# Altium PCB CW308T_AVR.PcbDoc
Units mil, origin at the board's own origin, x right, y up, seen from the top; angles counter-clockwise.
Board outline 2060 x 2680 mil, 2 copper layers (Top Layer, Bottom Layer); 14 components, 24 nets, 112 pads, 119 vias.
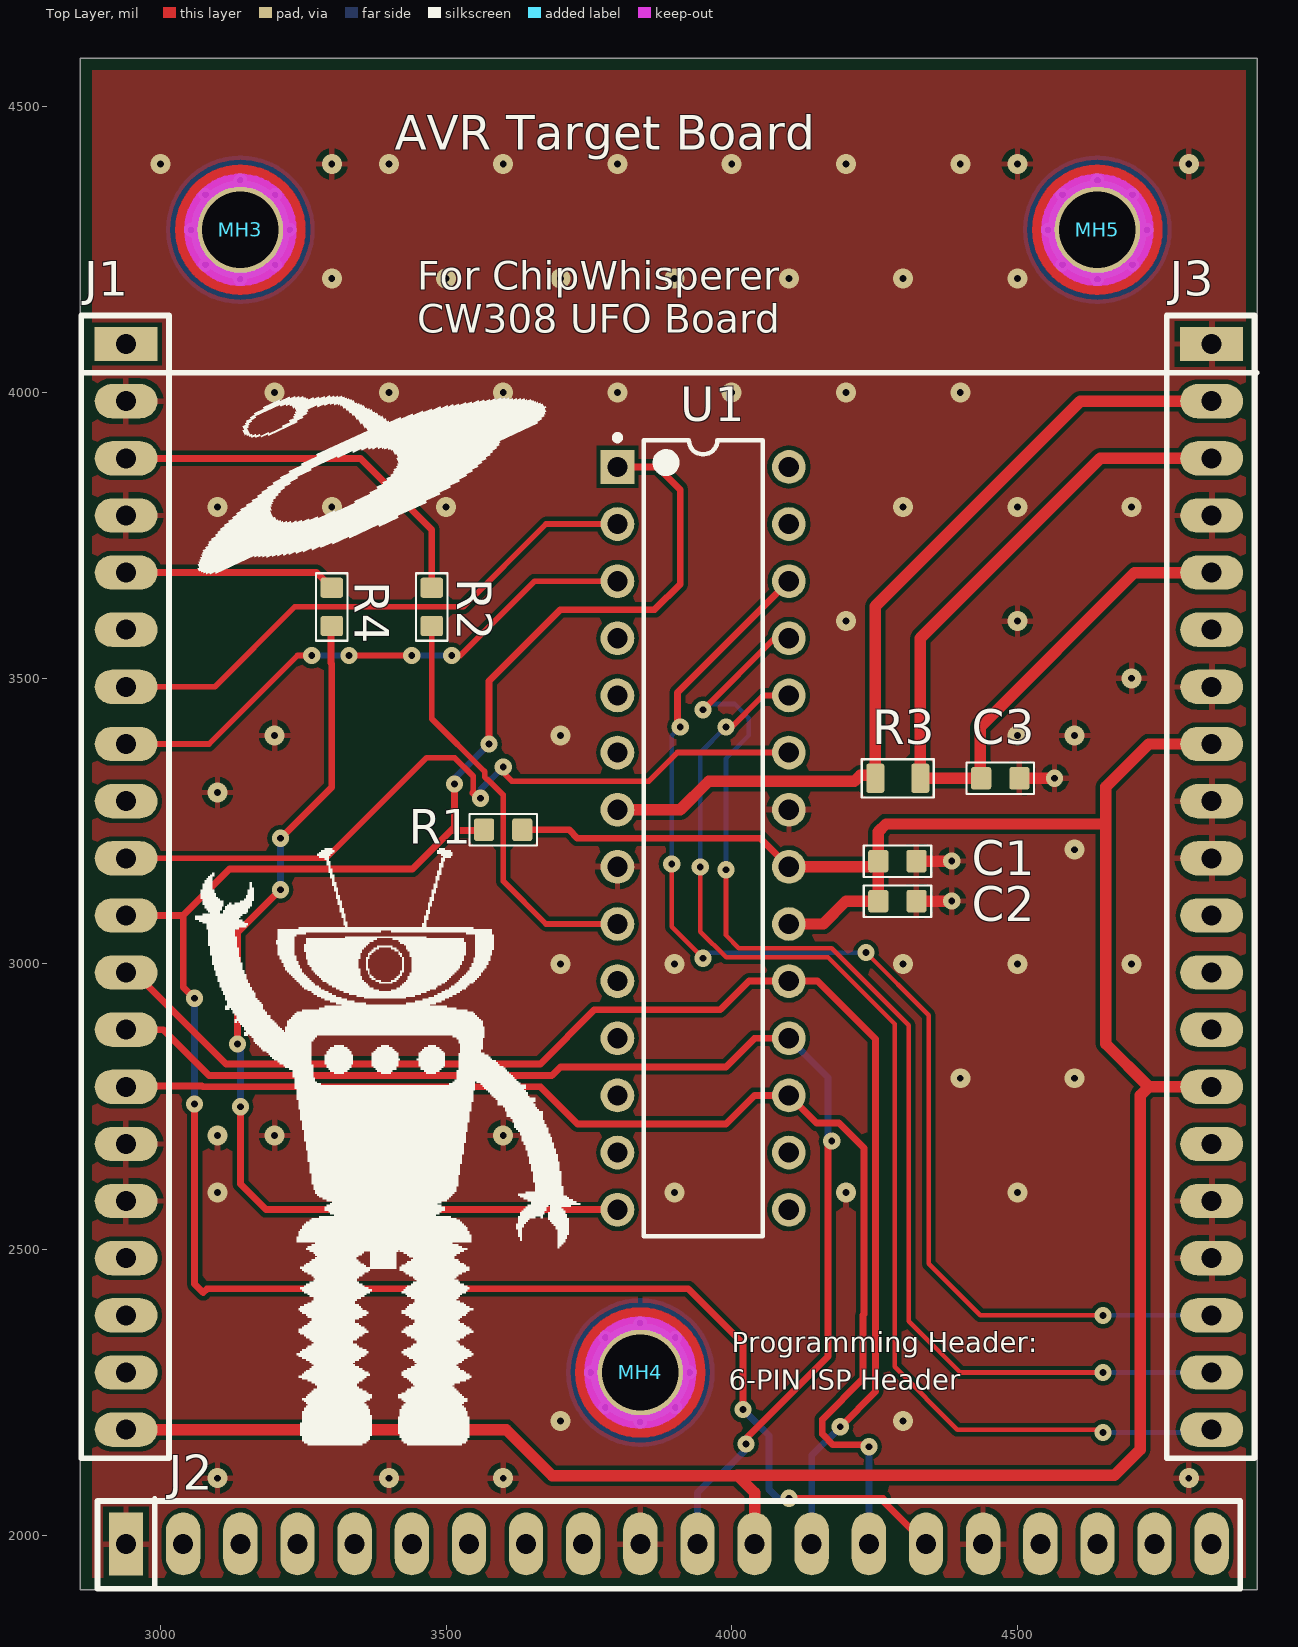
[diagram p0: Top Layer view]
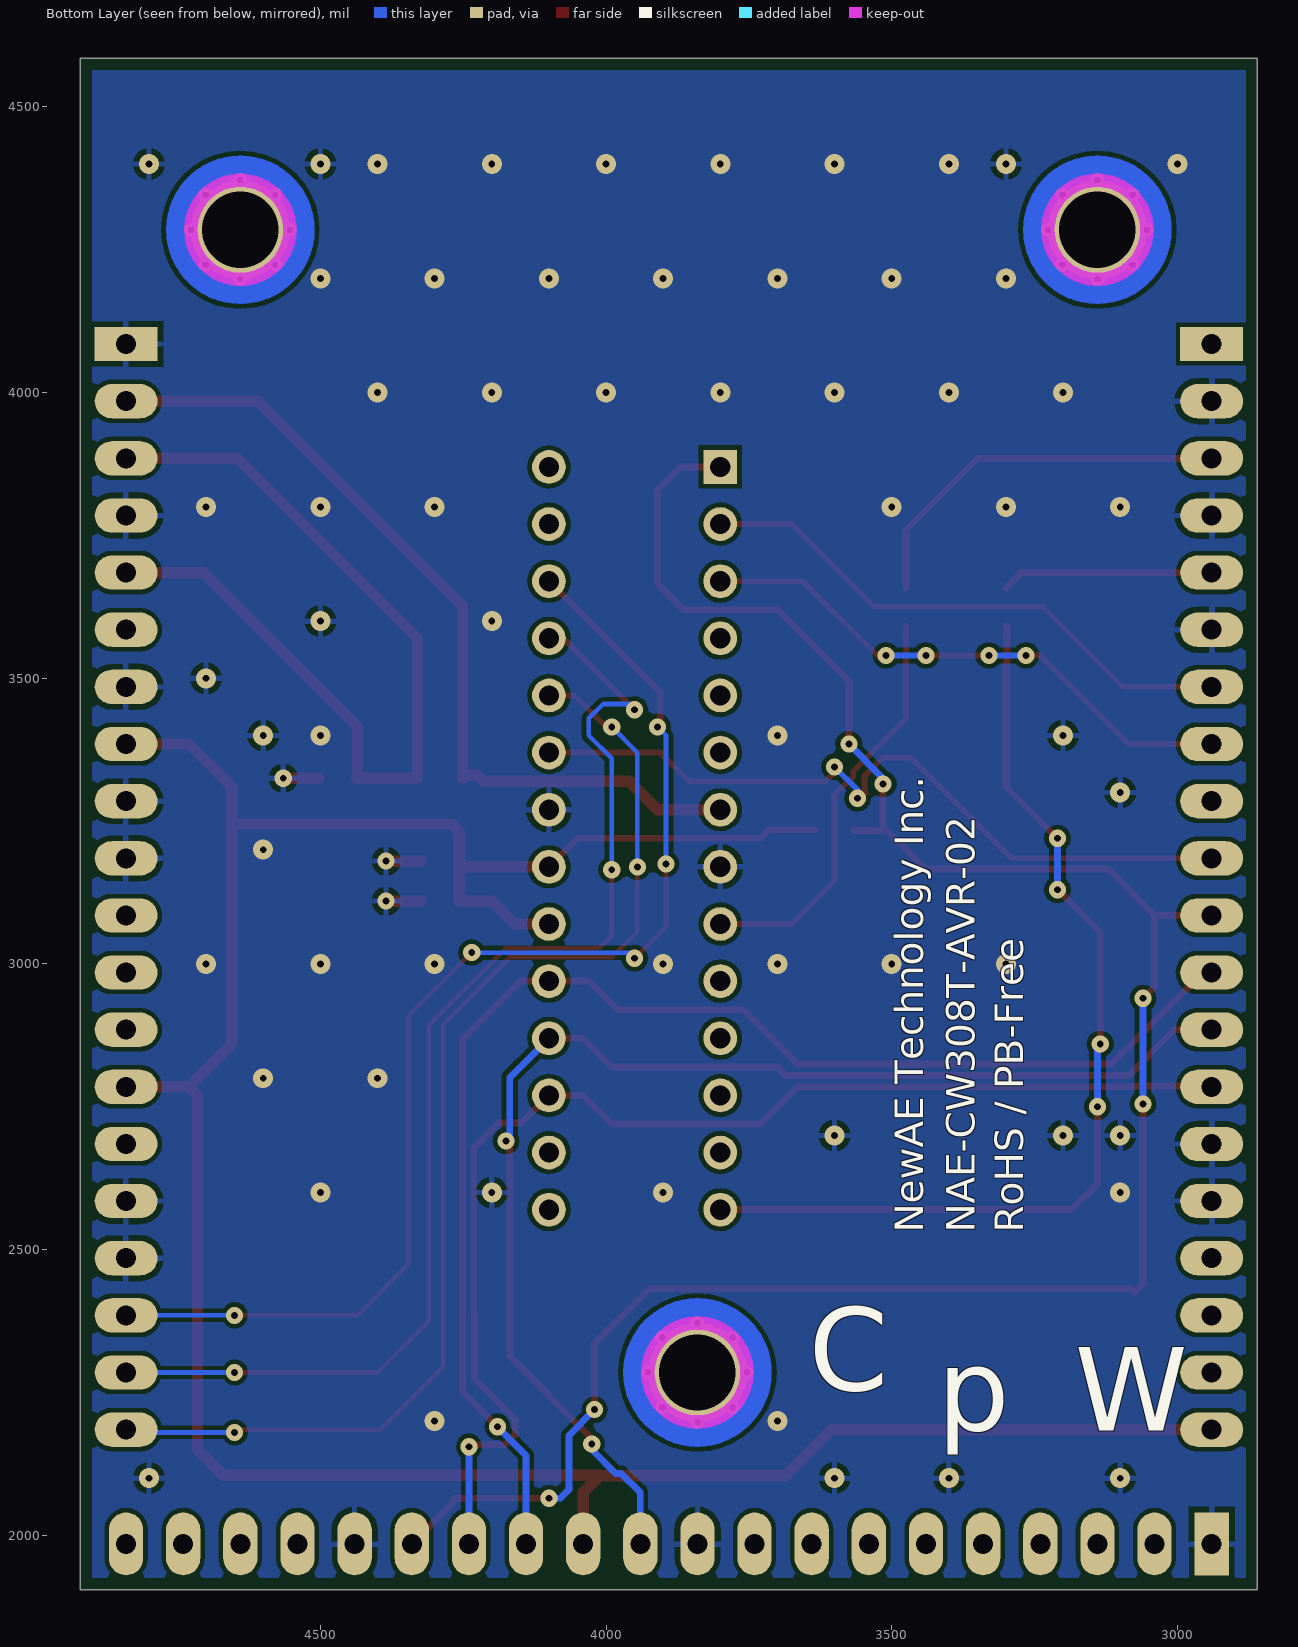
[diagram p1: Bottom Layer view, seen from below]
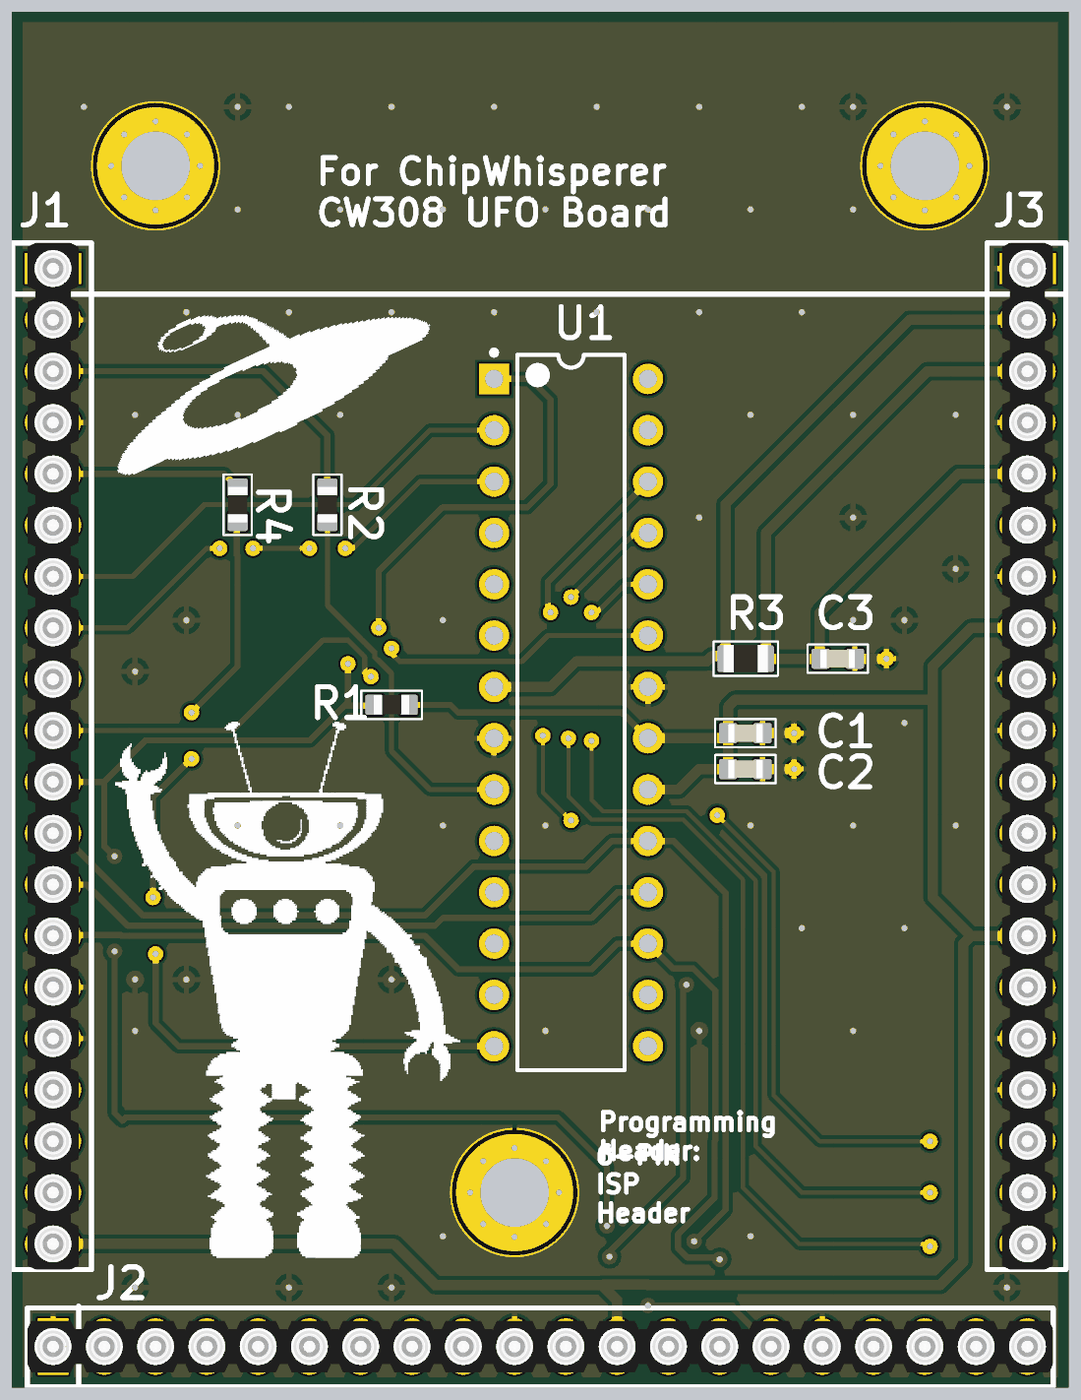
[diagram p2: 3D render of the assembled board from above, using the file's embedded part models]

## Layer stack, top to bottom
Top Solder: solder mask 0.4, Solder Resist, Dk 3.5
Top Layer: signal copper 1.4
Dielectric 1: dielectric 12.6, FR-4, Dk 4.8
Bottom Layer: signal copper 1.4
Bottom Solder: solder mask 0.4, Solder Resist, Dk 3.5

## Board outline
2860,1905 4920,1905 4920,4585 2860,4585

## Design rules (kind name [scope] priority, off if disabled: settings)
BoardOutlineClearance [All] p1: gap=20 except(0: Arc-SplitContinuation Track-SplitContinuation SMDPad-SplitContinuation THPad-SplitContinuation Via-SplitContinuation Fill-SplitContinuation Poly-SplitContinuation Region-SplitContinuation Text-SplitContinuation)
Clearance [All] p1: gap=8
PolygonConnect [All] p1: connectstyle=Relief reliefconductorwidth=10 reliefentries=4 polygonreliefangle="90 Angle" airgapwidth=10
RoutingVias [All] p1: holewidth=20 width=35 viastyle="Through Hole" minholewidth=12 minwidth=30 maxholewidth=28 maxwidth=50
SolderMaskExpansion [All] p1: expansion=4
Width [All] p1: maxlimit=50 minlimit=8 preferedwidth=10 minimp=50.000000 maximp=50.000000 favimp=50.000000
30 further rules are at their usual default settings.

## Classes and differential pairs
component class CW308T_AVR_MICRO: C1 C2 R1 U1
component class CW308T_AVR_CONN: C3 J1 J2 J3 MH3 MH4 MH5 R2 R3 R4

## Components (designator, comment, footprint, x,y, rotation, side; value= is the part's Value field where it differs from the comment)
C1 "approved sub OK" CAPC1608X90N 4290,3180 r0 top
C2 "approved sub OK" CAPC1608X90N 4290,3110 r0 top
C3 "approved sub OK" CAPC1608X90N 4470,3325 r0 top
J1 "20-Pin Header" 801-87-020-10-001101 2940,4085 r0 top locked
J2 "20-Pin Header" 801-87-020-10-001101 2940,1985 r90 top locked
J3 "20-Pin Header" 801-87-020-10-001101 4840,4085 r0 top locked
MH3 "Mounting-Hole-RND-Altium" Mounting-Hole-RND-Altium 3140,4285 r0 top locked
MH4 "Mounting-Hole-RND-Altium" Mounting-Hole-RND-Altium 3840,2285 r0 top locked
MH5 "Mounting-Hole-RND-Altium" Mounting-Hole-RND-Altium 4640,4285 r0 top locked
R1 "Thick Film" RESC1608X55N 3600,3235 r180 top
R2 "Thick Film" RESC1608X55N 3475,3625 r90 top
R3 "Thick Film" RESC2012X70N 4290.63,3325 r0 top
R4 "Thick Film" RESC1608X55N 3300,3625 r90 top
U1 "ATmega328P-PU" 28P3 3950,3220 r0 top

## Footprints (in the part's own frame and the unit in brackets; to place one, negate y for a bottom-side part, rotate by r counter-clockwise, add the part's x,y. Pads: shape width x height; smd on the part's side, far side on the other; paste and mask are expansions set on the pad)
28P3 [mm] "28-Pin Plastic Dual In-Line Package (PDIP)"
  rect 1.5x1.5 hole 0.9: 1(-3.81,16.51)
  round 1.5 hole 0.9: 2(-3.81,13.97) 3(-3.81,11.43) 4(-3.81,8.89) 5(-3.81,6.35) 6(-3.81,3.81) 7(-3.81,1.27) 8(-3.81,-1.27) 9(-3.81,-3.81) 10(-3.81,-6.35) 11(-3.81,-8.89) 12(-3.81,-11.43) 13(-3.81,-13.97) 14(-3.81,-16.51) 15(3.81,-16.51) 16(3.81,-13.97) 17(3.81,-11.43) 18(3.81,-8.89) 19(3.81,-6.35) 20(3.81,-3.81) 21(3.81,-1.27) 22(3.81,1.27) 23(3.81,3.81) 24(3.81,6.35) 25(3.81,8.89) 26(3.81,11.43) 27(3.81,13.97) 28(3.81,16.51)
  silkscreen extent -3.93,-17.7 2.65,17.93, body extent -3.6,-17.65 3.6,17.65, height 4.58
801-87-020-10-001101 [mil]
  rect 110x60 hole 35: 1(0,0)
  oval 110x60 hole 35: 2(0,-100) 3(0,-200) 4(0,-300) 5(0,-400) 6(0,-500) 7(0,-600) 8(0,-700) 9(0,-800) 10(0,-900) 11(0,-1000) 12(0,-1100) 13(0,-1200) 14(0,-1300) 15(0,-1400) 16(0,-1500) 17(0,-1600) 18(0,-1700) 19(0,-1800) 20(0,-1900)
  silkscreen extent -79,-1950 79,50, body extent -50,-1950 50,50, height 224
CAPC1608X90N [mm] "Chip Capacitor, Body 1.6x0.8mm, EIA 0603, IPC Medium Density"
  round 0.254 on Mech15: 0(0,0)
  rrect25% 0.9x1 smd: 1(-0.85,0) 2(0.85,0)
  Top Layer pour cut-out: -0.6,0.5 -0.4,0.7 0.4,0.7 0.6,0.5 0.6,-0.5 0.4,-0.7 -0.4,-0.7 -0.6,-0.5
  silkscreen extent -1.5,-0.7 1.5,0.7, body extent -0.85,-0.45 0.85,0.45, height 0.89
Mounting-Hole-RND-Altium [mm] "Mounting Hole, Altium, 4.4mm pad, 3.4mm plated hole"
  round 4.4 hole 3.4 mask+0.038: MOUNT(0,0)
  Top Layer circle w1: c0,0 r2.4
  Bottom Layer circle w1.2: c0,0 r2.702
  Keep-Out Layer circle w0.6: c0,0 r2.2
RESC1608X55N [mm] "Chip Resistor, Body 1.6x0.8mm, EIA 0603, IPC Medium Density"
  round 0.254 on Mech15: 0(0,0)
  rrect25% 0.9x1 smd: 1(-0.85,0) 2(0.85,0)
  Top Layer pour cut-out: -0.6,0.5 -0.4,0.7 0.4,0.7 0.6,0.5 0.6,-0.5 0.4,-0.7 -0.4,-0.7 -0.6,-0.5
  silkscreen extent -1.5,-0.7 1.5,0.7, body extent -0.87,-0.47 0.88,0.48, height 0.54
RESC2012X70N [mm] "Chip Resistor, Body 2.0x1.2mm, EIA 0805, IPC Medium Density"
  round 0.254 on Mech15: 0(0,0)
  rrect25% 0.8x1.3 smd: 1(-1,0) 2(1,0)
  Top Layer pour cut-out: -0.725,0.65 -0.525,0.85 0.525,0.85 0.725,0.65 0.725,-0.65 0.525,-0.85 -0.525,-0.85 -0.725,-0.65
  silkscreen extent -1.6,-0.85 1.6,0.85, body extent -1.1,-0.67 1.1,0.68, height 0.69

## Part data
C1 C2 C3: library part CAPC_100n_0603_X7R_50V_10%, "Capacitor SMD Cer 100nF 10% 50V X7R 0603"
J1 J2 J3: library part 801-87-020-10-001101, "1x20 Header, Machined"
MH3 MH4 MH5: library part CMP-0001-00029-1, "Mounting Hole, Altium, 4.4mm pad, 3.4mm plated hole"
R1: library part RES_10K_0603_1%, "Resistor SMD chip 10k Ohm 0.1W 1% 0603"
R2 R4: library part RES_100R_0603_1%, "Resistor SMD chip 100 Ohm 0.1W 1% 0603"
R3: library part RES_15R_0805_5%, "Resistor SMD chip 15 Ohm 0.125W 5% 0805"
U1: library part CMP-0095-00013-2, "8-bit AVR Microcontroller, 32KB Flash, 1KB EEPROM, 2KB SRAM, 28-pin PDIP, Industrial Grade (-40°C to 85°C)"

## Via types
v1: diameter 35, hole 12, Top Layer to Bottom Layer, tented both sides, 61 vias
v2: diameter 30, hole 12, Top Layer to Bottom Layer, 26 vias
v3: diameter 23.62, hole 11.81, Top Layer to Bottom Layer, tented both sides, 24 vias
v4: diameter 30, hole 12, Top Layer to Bottom Layer, tented both sides, 8 vias

## Nets (pads, with @x,y where several pads share a name; then routed paths per layer and width w, separated by ;. In a path a pad name is that pad's centre, name@x,y a point inside that pad or via, vN(x,y) a via of type N, cw(c..) or ccw(c..) an arc to the next point about the centre after c; other vN are vias at no path point)
CLKIN: J1.3 R2.2 | length 688.3
  Top Layer w12: J1.3 3350,3885 3475,3760 R2.2
CLKOUT: J1.5 R4.2 | length 371
  Top Layer w12: J1.5 3273.47,3685 R4.2
FILT_HP: J3.6
FILT_LP: C3.1 J3.3 J3.5 R3.2 | length 1599.5
  Top Layer w20: J3.5 4705,3685 4435,3415 4435,3326.54 C3.1 R3.2 4330,3570 4645,3885 J3.3
FILTIN: C1.1 C2.1 J1.20 J2.12 J3.8 J3.14 R1.1 U1.20 U1.21 | length 4836.2
  Top Layer w12: R1.1 3715,3235 3730,3220 4050,3220 U1.21
  Top Layer w20: J1.20 3605,2185 3685.5,2104.5 4009.5,2104.5 4010,2105 ; J2.12 4040,2075 4010,2105 ; U1.20 4160,3070 4200,3110 C2.1 4256.54,3231.54 4270,3245 4655,3245 ; U1.21 4246.54,3170 C1.1 ; J3.14 4730,2785 ; J3.8 4730,3385 4655,3310 4655,3245 ; 4010,2105 4010.5,2105.5 4099.7,2105.5 4100.2,2105 4670,2105 4715,2150 4715,2770 4730,2785 ; 4655,3245 4655,2860 4730,2785
GND: C1.2 C2.2 C3.2 J1.2 J1.4 J1.6 J1.15 J1.16 J2.1 J2.10 J2.16 J3.1 J3.4 J3.7 J3.9 J3.10 J3.16 J3.17 U1.8 U1.22 | length 184.6
  Top Layer w20: C2.2 v2(4385,3110) ; C1.2 v2(4385,3180) ; C3.2 v2(4565,3325)
  other v1: 3100,2100 3400,2100 3600,2100 4800,2100 3700,2200 4300,2200 3100,2600 3900,2600 4200,2600 4500,2600 3100,2700 3200,2700 3600,2700 4400,2800 4600,2800 3300,3000 3500,3000 3700,3000 3900,3000 4300,3000 4500,3000 4700,3000 4600,3200 3100,3300 3200,3400 3700,3400 4500,3400 4600,3400 4700,3500 4200,3600 4500,3600 3100,3800 3300,3800 3500,3800 4300,3800 4500,3800 4700,3800 3200,4000 3400,4000 3600,4000 3800,4000 4000,4000 4200,4000 4400,4000 3300,4200 3500,4200 3700,4200 3900,4200 4100,4200 4300,4200 4500,4200 3000,4400 3300,4400 3400,4400 3600,4400 3800,4400 4000,4400 4200,4400 4400,4400 4500,4400 4800,4400
GPIO1/TX: J1.7 U1.2 | length 978.1
  Top Layer w10: J1.7 3095,3485 3235,3625 3530,3625 3675,3770 U1.2
GPIO2/RX: J1.8 U1.3 | length 1023.1
  Top Layer w10: J1.8 3085,3385 3240,3540 v2@3260,3540 ; v2(3330,3540) v2(3440,3540) ; v2(3510,3540) 3525,3540 3655,3670 U1.3
  Top Layer w12: J1.8@2895,3385 J1.8 ; v2@3260,3540 v2(3265,3540)
  Bottom Layer w10: v2(3265,3540) v2(3330,3540) ; v2(3440,3540) v2(3510,3540)
GPIO3: J1.9
GPIO4/TRIG: J1.10 U1.23 | length 1350.2
  Top Layer w10: J1.10 3290,3185 3465.96,3360.96 3515,3360.96 3547.5,3328.46 3547.5,3301.54 3545.96,3300 3545.96,3299.04 3555,3290 v2(3560,3290) ; v2(3600,3345) 3600,3335 3615,3320 3855,3320 3905,3370 U1.23
  Bottom Layer w10: v2(3560,3290) 3560,3305 v2(3600,3345)
LED1: J3.18 U1.26 | length 2183.8
  Top Layer w8: v2(3895,3175) 3895,3065 v2(3950,3010) ; v2(4235,3020) 4345,2910 4345,2475 4435,2385 v2(4650,2385)
  Top Layer w12: v2(3910,3415) 3905,3420 3905,3475 U1.26
  Bottom Layer w8: v2(3895,3175) 3895,3400 v2(3910,3415) ; v2(3950,3010) 3960,3020 v2(4235,3020) ; v2(4650,2385) J3.18
LED2: J3.19 U1.25 | length 2170
  Top Layer w8: v2(3990,3165) 3990,3050 4012.47,3027.53 4175.1,3027.53 4310,2892.63 4310,2375 4400,2285 v2(4650,2285)
  Top Layer w10: v2(3950,3445) 4075,3570 U1.25 ; J3.19@4835,2290 J3.19
  Bottom Layer w8: v2(3950,3445) 3960,3455 4005,3455 4030,3430 4030,3400 3990,3360 v2(3990,3165) ; v2(4650,2285) J3.19
LED3: J3.20 U1.24 | length 2130.5
  Top Layer w8: v2(3945,3170) 3945,3056.72 3990.19,3011.53 4168.47,3011.53 4285,2895 4285,2295 4395,2185 4645,2185 v2(4650,2180) v2@4645,2180
  Top Layer w10: v2(3990,3415) 3995,3410 4055,3470 U1.24
  Bottom Layer w8: v2(3945,3170) 3945,3370 v2(3990,3415) ; v2(4650,2180) 4835,2180 J3.20
MISO: J1.13 J2.11 U1.18 | length 2239.1
  Top Layer w12: J1.13 3005,2885 3085,2805 3685,2805 3700,2820 3990,2820 4040,2870 U1.18 ; v4(4025,2160) 4025,2169.55 4168.5,2313.05 4168.5,2683.5 v4(4175,2690)
  Bottom Layer w12: J2.11 3940,2075 3973.5,2108.5 3983.05,2108.5 4025,2150.45 v4(4025,2160) ; U1.18 4168.5,2801.5 4168.5,2696.5 v4(4175,2690)
MOSI: J1.14 J2.14 U1.17 | length 2170.4
  Top Layer w12: J1.14 2941.5,2786.5 3073.05,2786.5 3074.55,2785 3665,2785 3730,2720 3990,2720 4040,2770 U1.17 4148.5,2721.5 4188.05,2721.5 4231.5,2678.05 4231.5,2386.95 4230,2385.45 4230,2274.55 4158.5,2203.05 4158.5,2176.95 4176.95,2158.5 4236.5,2158.5 v4(4240,2155)
  Bottom Layer w12: J2.14 v4(4240,2155)
NetR2_1: R2.1 U1.9 | length 729.9
  Top Layer w10: R2.1 3475,3429.25 3567.5,3336.75 3567.5,3327.5 3572.5,3322.5 3573.46,3322.5 3600,3295.96 3600,3145 3675,3070 U1.9
NetR4_1: R4.1 U1.14 | length 1726.8
  Top Layer w12: v2(3135,2860) 3135,3055 v2(3210,3130) ; v2(3140,2750) 3140,2615 3185,2570 U1.14 ; v2(3210,3220) 3300,3310 3300,3525.45 3298.5,3526.95 3298.5,3590.04 R4.1
  Bottom Layer w12: v2(3135,2860) 3140,2855 v2(3140,2750) ; v2(3210,3130) v2(3210,3220)
NRST: J1.11 J2.15 R1.2 U1.1 | length 3934.3
  Top Layer w12: J1.11 3040,3085 ; v4(3060,2755) 3060,2440 3075,2425 3081.5,2431.5 3923.95,2431.5 4020,2335.45 v4(4020,2220) ; v4(3060,2940) 3040,2960 3040,3085 ; v2(3515,3315) 3515,3240 3508.46,3233.46 ; R1.2 3565,3233.46 3508.46,3233.46 ; v2(3575,3385) 3575,3495 3700,3620 3865,3620 3910,3665 3910,3830 3870,3870 3810,3870 3805,3875 U1.1 ; v4(4100,2065) 4265,2065 4262.5,2062.5 J2.15 ; 3040,3085 3121,3166 3441,3166 3508.46,3233.46
  Bottom Layer w12: v4(3060,2755) v4(3060,2940) ; v2(3515,3315) 3515,3325 v2(3575,3385) ; v4(4020,2220) 4065,2175 4065,2080 4080,2065 v4(4100,2065)
SCK: J1.12 J2.13 U1.19 | length 2409.6
  Top Layer w12: J1.12 2955,2985 3115,2825 3665,2825 3760,2920 3980,2920 4030,2970 U1.19 4150,2970 4251.5,2868.5 4251.5,2251.5 v4(4190,2190)
  Bottom Layer w12: J2.13 4140,2140 v4(4190,2190)
SHUNTL: J3.2 R3.1 U1.7 | length 1516.8
  Top Layer w20: U1.7 3910,3270 3959.53,3319.53 4214.53,3319.53 4225,3330 4246.26,3330 R3.1 4251.26,3626.26 4610,3985 J3.2
VCC1.2: J3.11
VCC1.8: J3.12
VCC2.5: J3.13
VCC5.0: J3.15
pads on no net: C1.0 C2.0 C3.0 J1.1 J1.17 J1.18 J1.19 J2.2 J2.3 J2.4 J2.5 J2.6 J2.7 J2.8 J2.9 J2.17 J2.18 J2.19 J2.20 MH3.MOUNT MH4.MOUNT MH5.MOUNT R1.0 R2.0 R3.0 R4.0 U1.4 U1.5 U1.6 U1.10 U1.11 U1.12 U1.13 U1.15 U1.16 U1.27 U1.28
copper on no net:
  other v3: 3840,2198.39 3778.75,2223.75 3901.25,2223.75 3753.39,2285 3926.61,2285 3778.75,2346.25 3901.25,2346.25 3840,2371.61 3140,4198.39 4640,4198.39 3078.75,4223.75 3201.25,4223.75 4578.75,4223.75 4701.25,4223.75 3053.39,4285 3226.61,4285 4553.39,4285 4726.61,4285 3078.75,4346.25 3201.25,4346.25 4578.75,4346.25 4701.25,4346.25 3140,4371.61 4640,4371.61

## Polygon pours and split planes (outlines as drawn)
GND on Bottom Layer "BOT" (solid, pour order 4): 2820,4655 4975,4655 4975,1860 4935,1820 2795,1820
GND on Top Layer "TOP" (solid, pour order 6): 2745,4635 5025,4635 5120,4540 5085,4505 5085,1780 2875,1780 2710,1945

## Silkscreen, mask and mechanical layers (free items; w line width, h text height)
Top Overlay:
  drawing of 8 lines, arcs and shapes, not listed
  text "AVR Target Board" at 3410,4425 h60
  text "For ChipWhisperer / CW308 UFO Board" at 3450,4105 h50
  text "Programming Header:" at 4000,2320 h35
  text "6-PIN ISP Header" at 3995,2255 h35
Bottom Overlay:
  text "RoHS / PB-Free" at 3270,2530 h50 r270
  text "NAE-CW308T-AVR-02" at 3355,2530 h50 r270
  text "NewAE Technology Inc." at 3445,2530 h50 r270
  text "C" at 3645,2205 h250
  text "W" at 3180,2135 h250
  text "p" at 3420,2135 h250
Board Outline:
  lines w15: 2865,4585 2860,4585 ; 2860,4585 2860,1905 4920,1905 4920,2540 4920,3900 4920,4585 2860,4585